# EAGLE board cnc_driver_4 (EAGLE 7.6.0)

Size 120.63 x 79.68 mm. Coordinates in mm from the lower left corner, seen from the top.
Outline: 0,0 120.63,0 120.63,79.68 0,79.68 0,0
Copper layers (1*16): Top 0.035mm / dielectric 1.5mm / Bottom 0.035mm
Design rules "default": minimum track width 10mil, minimum drill 24mil, track to track 8mil, track to pad 8mil, pad to pad 8mil, via to via 8mil, smd to smd 8mil, copper to edge 40mil, drill to drill 8mil, minimum pad ring 10mil, minimum via ring 8mil, stop-mask expansion 4mil, vias tented up to drill 0mil, thermal gap 10mil

## Footprints (pad centres in the part's own frame; a part is rotated, then mirrored left to right if it is on the bottom)
E2-5 = drill 0.813 pad 1.422: + -1.016,0 | drill 0.813 pad 1.422 octagon: - 1.016,0
C025-025X050 = drill 0.813 pad 1.676 octagon: 1 -1.27,0; 2 1.27,0
E3,5-8 = drill 0.813 pad 1.6: + -1.778,0 | drill 0.813 pad 1.6 octagon: - 1.778,0
C025-024X044 = drill 0.813 pad 1.422 octagon: 1 -1.27,0; 2 1.27,0
2,8-PAD = drill 2.8 pad 5.334: B2,8 0,0
DIL16 = drill 0.813 long: 1 -8.89,-3.81; 2 -6.35,-3.81; 3 -3.81,-3.81; 4 -1.27,-3.81; 5 1.27,-3.81; 6 3.81,-3.81; 7 6.35,-3.81; 8 8.89,-3.81; 9 8.89,3.81; 10 6.35,3.81; 11 3.81,3.81; 12 1.27,3.81; 13 -1.27,3.81; 14 -3.81,3.81; 15 -6.35,3.81; 16 -8.89,3.81
317TS = drill 1.016 long: 1 -2.54,-2.54; 2 0,-2.54; 3 2.54,-2.54
2X12 = drill 1.016 octagon: 1 -13.97,-1.27; 2 -13.97,1.27; 3 -11.43,-1.27; 4 -11.43,1.27; 5 -8.89,-1.27; 6 -8.89,1.27; 7 -6.35,-1.27; 8 -6.35,1.27; 9 -3.81,-1.27; 10 -3.81,1.27; 11 -1.27,-1.27; 12 -1.27,1.27; 13 1.27,-1.27; 14 1.27,1.27; 15 3.81,-1.27; 16 3.81,1.27; 17 6.35,-1.27; 18 6.35,1.27; 19 8.89,-1.27; 20 8.89,1.27; 21 11.43,-1.27; 22 11.43,1.27; 23 13.97,-1.27; 24 13.97,1.27
LED5MM = drill 0.813 pad 1.676 octagon: A -1.27,0; K 1.27,0
0204/7 = drill 0.813 pad 1.676 octagon: 1 -3.81,0; 2 3.81,0
0207/7 = drill 0.813 octagon: 1 -3.81,0; 2 3.81,0
CA9H = drill 1.321 octagon: A -2.54,0; E 2.54,0; S 0,2.54
FE04-1 = drill 0.813 long: 1 -5.08,0; 2 -2.54,0; 3 0,0; 4 2.54,0
MA08-1 = drill 1.016 long: 1 -8.89,0; 2 -6.35,0; 3 -3.81,0; 4 -1.27,0; 5 1.27,0; 6 3.81,0; 7 6.35,0; 8 8.89,0
MA06-1 = drill 1.016 long: 1 -6.35,0; 2 -3.81,0; 3 -1.27,0; 4 1.27,0; 5 3.81,0; 6 6.35,0

## Placement (x,y rotation side)
C1  100uf  [E2-5]  80.01,55.88 0 top
C2  0.1uf  [E2-5]  43.18,74.93 0 top
C3  0.1uf  [E2-5]  99.06,63.5 0 top
C4  100uf  [E2-5]  72.39,59.69 0 top
C5  0.1uf  [C025-025X050]  16.51,41.91 0 top
C6  100uf  [E2-5]  39.37,10.16 0 top
C7  0.1uf  [C025-025X050]  21.59,64.77 0 top
C8  100uf  [E2-5]  68.58,69.85 0 top
C9  0.1uf  [C025-025X050]  21.59,60.96 0 top
C10  47uf  [E2-5]  48.26,71.12 0 top
C11  47uf  [E2-5]  66.04,74.93 0 top
C12  47uf  [E2-5]  88.9,55.88 0 top
C13  100uf  [E3,5-8]  85.09,48.26 0 top
C14  100uf  [E3,5-8]  87.63,39.37 0 top
C15  100uf  [E3,5-8]  85.09,29.21 0 top
C16  0.1uf  [C025-024X044]  16.51,30.48 0 top
C17  0.1uf  [C025-024X044]  52.07,11.43 0 top
C18  0.1uf  [C025-024X044]  66.04,11.43 0 top
C19  0.1uf  [C025-025X050]  16.51,35.56 0 top
C20  0.1uf  [C025-025X050]  58.42,11.43 0 top
C21  100uf  [E3,5-8]  74.93,48.26 0 top
C22  100uf  [E3,5-8]  77.47,39.37 0 top
C23  47uf  [E3,5-8]  74.93,29.21 0 top
H1  MOUNT-PAD-ROUND2.8  [2,8-PAD]  102.87,6.35 0 bottom
H2  MOUNT-PAD-ROUND2.8  [2,8-PAD]  111.76,6.35 0 top
IC1  L293D  [DIL16]  31.75,53.34 0 top
IC2  L293D  [DIL16]  31.75,27.94 0 top
IC3  L293D  [DIL16]  57.15,53.34 0 top
IC4  L293D  [DIL16]  57.15,27.94 0 top
IC5  74HCT595N  [DIL16]  34.29,40.64 0 top
IC6  74HCT595N  [DIL16]  62.23,39.37 0 top
IC7  [317TS]  83.82,64.77 0 top
IC8  [317TS]  83.82,13.97 180 top
IC9  [317TS]  105.41,54.61 270 top
IC10  [317TS]  105.41,24.13 90 bottom
JP1  [2X12]  96.52,39.37 270 top
LED1  [LED5MM]  43.18,5.08 180 top
R1  [0204/7]  48.26,7.62 90 top
R2  250R  [0207/7]  6.35,46.99 180 top
R3  250R  [0207/7]  7.62,17.78 0 top
R4  250R  [0207/7]  16.51,46.99 180 top
R5  1K  [CA9H]  6.35,71.12 0 top
R6  1K  [CA9H]  6.35,8.89 180 top
R7  1K  [CA9H]  17.78,71.12 0 top
R8  1K  [0207/7]  6.35,50.8 0 top
R9  1K  [0207/7]  7.62,13.97 180 top
R10  1K  [0207/7]  16.51,50.8 0 top
R11  250R  [0207/7]  15.24,24.13 180 top
R12  1K  [0207/7]  15.24,20.32 0 top
R13  1k  [CA9H]  17.78,8.89 180 top
SV1  [FE04-1]  34.29,73.66 0 top
SV2  [FE04-1]  33.02,6.35 0 top
SV3  [FE04-1]  58.42,73.66 0 top
SV4  [FE04-1]  58.42,6.35 0 top
SV5  [MA08-1]  33.02,16.51 0 top
SV6  [MA08-1]  54.61,16.51 0 top
SV7  [MA06-1]  39.37,64.77 180 top
SV8  [MA06-1]  57.15,64.77 180 top
U$2  [FK213]  83.82,66.04 0 top
U$3  [FK213]  83.82,12.7 180 top
U$4  [FK213]  106.68,54.61 270 top
U$5  [FK213]  106.68,24.13 270 top

## Library data of the parts
C1-C23 LED1 R1-R4 R8-R12 = adafruit
H1 H2 = holes
IC1-IC4 = st-microelectronics; MPN: L293D; OC_FARNELL: 9589619; OC_NEWARK: 56P8249
IC5 IC6 = 74xx-eu
IC7-IC10 = v-reg
JP1 = pinhead
R5-R7 R13 = pot
SV1-SV4 = custom_fem_headers_4x1; OC_FARNELL: unknown; OC_NEWARK: unknown
SV5-SV8 = con-lstb; OC_FARNELL: unknown; OC_NEWARK: unknown
U$2-U$5 = heatsink

## Nets
DIR_CLK_1: IC5.11 SV6.4
DIR_CLK_2: IC6.11 SV6.5
DIR_LATCH_1: IC5.12 SV5.4
DIR_LATCH_2: IC6.12 SV5.5
DIR_SER_1: IC5.14 SV5.8
DIR_SER_2: IC6.14 SV6.1
GND: C1.- C2.- C3.- C4.- C5.2 C6.- C7.2 C8.- C9.2 C10.- C11.- C12.- C13.- C14.- C15.- C16.2 C17.2 C18.2 C19.2 C20.2 C21.- C22.- C23.- IC1.4 IC1.5 IC1.12 IC1.13 IC2.4 IC2.5 IC2.12 IC2.13 IC3.4 IC3.5 IC3.12 IC3.13 IC4.4 IC4.5 IC4.12 IC4.13 IC5.8 IC6.8 JP1.5 LED1.K R5.S R6.S R7.S R13.S SV7.2
M1A: IC1.2 IC5.2
M1B: IC1.7 IC5.3
M2A: IC1.15 IC5.1
M2B: IC1.10 IC5.4
M3A: IC2.2 IC5.15
M3B: IC2.7 IC5.6
M4A: IC2.15 IC5.5
M4B: IC2.10 IC5.7
M5A: IC3.2 IC6.2
M5B: IC3.7 IC6.3
M6A: IC3.15 IC6.1
M6B: IC3.10 IC6.4
M7A: IC4.2 IC6.15
M7B: IC4.7 IC6.6
M8A: IC4.15 IC6.5
M8B: IC4.10 IC6.7
MTR_PWR_1: IC1.1 IC1.9 SV5.6
MTR_PWR_2: IC2.1 IC2.9 SV5.7
MTR_PWR_3: IC3.1 IC3.9 SV6.2
MTR_PWR_4: IC4.1 IC4.9 SV6.3
N$1: IC1.3 SV1.1
N$2: IC1.6 SV1.2
N$3: IC1.11 SV1.3
N$4: IC1.14 SV1.4
N$5: LED1.A R1.1
N$6: R6.A R9.2
N$7: C10.+ C13.+ IC1.8 IC7.2 R2.1
N$8: IC2.3 SV2.1
N$9: IC2.6 SV2.2
N$10: IC2.11 SV2.3
N$11: IC2.14 SV2.4
N$12: IC3.3 SV3.1
N$13: IC3.6 SV3.2
N$14: IC3.14 SV3.4
N$15: IC3.11 SV3.3
N$16: IC7.1 R2.2 R8.1
N$17: R5.A R8.2
N$18: IC8.1 R3.2 R9.1
N$19: C11.+ C14.+ IC2.8 IC8.2 R3.1
N$20: IC9.1 R4.2 R10.1
N$21: C12.+ C15.+ IC3.8 IC9.2 R4.1
N$22: R7.A R10.2
N$23: C21.+ C23.+ IC4.8 IC10.2 R11.1
N$24: IC10.1 R11.2 R12.1
N$25: R12.2 R13.A
N$26: IC4.11 SV4.3
N$27: IC4.6 SV4.2
N$28: IC4.3 SV4.1
N$29: IC4.14 SV4.4
N$30: JP1.8 JP1.10
N$32: H1.B2,8 JP1.21
N$33: SV7.6
N$34: SV5.1
N$35: SV5.2
N$36: SV5.3
N$37: SV6.6
N$38: SV6.7
N$39: SV6.8
N$40: SV7.5
N$41: SV7.3
N$42: SV7.1
N$43: SV8.6
N$44: SV8.5
N$45: SV8.4
N$46: SV8.3
N$47: SV8.2
N$48: SV8.1
V+: C16.1 C17.1 C18.1 C20.1 H2.B2,8 IC7.3 IC8.3 IC9.3 IC10.3 R1.2
VCC: C1.+ C2.+ C3.+ C4.+ C5.1 C6.+ C7.1 C8.+ C9.1 C19.1 C22.+ IC1.16 IC2.16 IC3.16 IC4.16 IC5.10 IC5.16 IC6.10 IC6.16 SV7.4

## Tracks (layer width: path | path; a pad name or v marks a point on that pad's centre or on a via)
DIR_CLK_1  (1 unrouted)
DIR_CLK_2  (1 unrouted)
DIR_LATCH_1  (1 unrouted)
DIR_LATCH_2  (1 unrouted)
DIR_SER_1  (1 unrouted)
DIR_SER_2  (1 unrouted)
GND  (47 unrouted)
M1A  (1 unrouted)
M1B  (1 unrouted)
M2A  (1 unrouted)
M2B  (1 unrouted)
M3A  (1 unrouted)
M3B  (1 unrouted)
M4A  (1 unrouted)
M4B  (1 unrouted)
M5A  (1 unrouted)
M5B  (1 unrouted)
M6A  (1 unrouted)
M6B  (1 unrouted)
M7A  (1 unrouted)
M7B  (1 unrouted)
M8A  (1 unrouted)
M8B  (1 unrouted)
MTR_PWR_1  (2 unrouted)
MTR_PWR_2  (2 unrouted)
MTR_PWR_3  (2 unrouted)
MTR_PWR_4  (2 unrouted)
N$1  (1 unrouted)
N$2  (1 unrouted)
N$3  (1 unrouted)
N$4  (1 unrouted)
N$5  (1 unrouted)
N$6  (1 unrouted)
N$7  (4 unrouted)
N$8  (1 unrouted)
N$9  (1 unrouted)
N$10  (1 unrouted)
N$11  (1 unrouted)
N$12  (1 unrouted)
N$13  (1 unrouted)
N$14  (1 unrouted)
N$15  (1 unrouted)
N$16  (2 unrouted)
N$17  (1 unrouted)
N$18  (2 unrouted)
N$19  (4 unrouted)
N$20  (2 unrouted)
N$21  (4 unrouted)
N$22  (1 unrouted)
N$23  (4 unrouted)
N$24  (2 unrouted)
N$25  (1 unrouted)
N$26  (1 unrouted)
N$27  (1 unrouted)
N$28  (1 unrouted)
N$29  (1 unrouted)
N$30  (1 unrouted)
N$32  (1 unrouted)
V+  (9 unrouted)
VCC  (19 unrouted)